# Altium PCB PCB1.PcbDoc (part 2 of 2)
Units mil, origin at the board's own origin, x right, y up, seen from the top; angles counter-clockwise.
Board outline 6000 x 4000 mil, 2 copper layers (Top Layer, Bottom Layer); 64 components, 67 nets, 213 pads, 0 vias.
Unrouted connection lines stored in the file: 121.
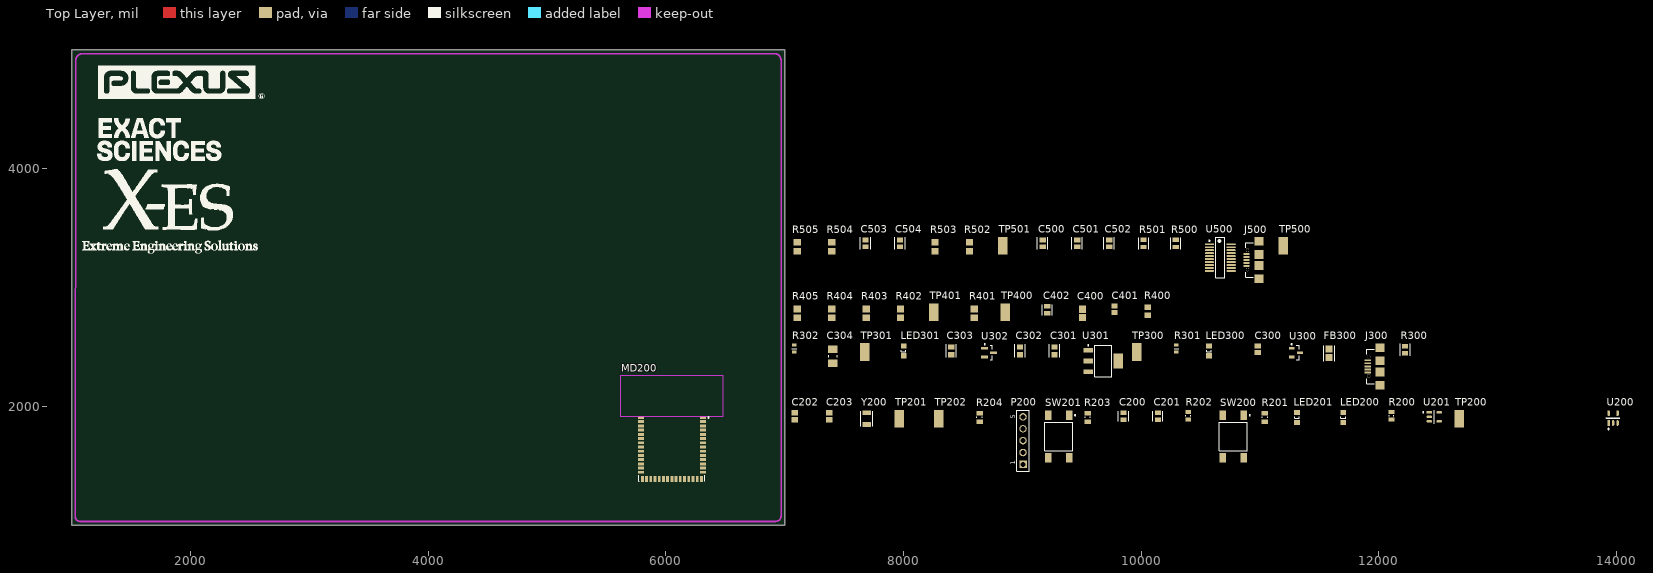
[diagram p0: Top Layer view]

## Nets (pads, with @x,y where several pads share a name; then routed paths per layer and width w, separated by ;. In a path a pad name is that pad's centre, name@x,y a point inside that pad or via, vN(x,y) a via of type N, cw(c..) or ccw(c..) an arc to the next point about the centre after c; other vN are vias at no path point) (continued)
P0_0: C202.2 MD200.5 Y200.1
P0_1: C203.2 MD200.6 Y200.2
P0_4: MD200.41
P0_5: MD200.2
P5_0: MD200.39
P5_1: MD200.40
P5_2: MD200.38
P5_3: MD200.37
P5_4: MD200.25
P6_2: MD200.28
P6_3: MD200.30
P6_4: MD200.24
P6_5: MD200.29
P7_1: MD200.23
P7_2: MD200.22 R405.1
P7_7: MD200.31
P9.0: MD200.17 R403.1
P9.1: MD200.18 R404.1
P9.2: MD200.21 R402.1
P9.3: MD200.9 R401.1
P9_4: MD200.14
P9_5: MD200.19
P9_6: MD200.20
P10.0: MD200.13 R502.1
P10.1: MD200.12 R503.1
P10.2: MD200.33 R504.1
P10.3: MD200.7 R505.1
P10.4: MD200.8
P10.5: MD200.11
P10.6: MD200.10
P12_6: MD200.34
P12_7: MD200.35
PB_IN: MD200.32 R203.1 SW201.2
PRG_RESET_N: P200.3 R204.1 U201.2
RESET1: U200.4 U201.1
RESET_N: R201.1 SW200.2 U200.2
SPI_CS: R401.2
SPI_SCLK: R402.2
SPI_SDI: R403.2
SPI_SDO: R404.2
SWDCLK: MD200.26 P200.4
SWDIO: MD200.27 P200.5
USB_D_M: C500.1 J500.2 R500.1
USB_D_P: C501.1 J500.3 R501.1
USBDM: R500.2 U500.12
USBDP: R501.2 U500.11
USR_LED: LED201.2 MD200.36
USR_LED_R: LED201.1 R202.2
VBACKUP: MD200.3
VREF: MD200.16
XRES_N: LED200.1 MD200.42 TP200.1 U201.4
XRES_N_R: LED200.2 R200.1
pads on no net: J300.2 J300.3 J300.MH1 J300.MH2 J300.Shell J500.1 J500.4 J500.MH1 J500.MH2 SW200.1 SW200.4 SW201.1 SW201.4 U500.1 U500.5 U500.7 U500.8 U500.10 U500.13 U500.17 U500.18 U500.19

## Keep-outs
Keep-Out Layer:
  lines w15: 1030,1070 ccw(c1072.5,1072.5) 1075,1030 ; 1030,1075 1035.21,4910.21 cw(c1090,4910.21) 1090,4965 ; 1080,1030 6920,1030 ; 1095,4965 6925,4965 ; 6915,4965 cw(c6916.5,4913.35) 6968.11,4916.05 ; 6925,1030 ccw(c6922.5,1077.5) 6970,1080 6970,4910

## Silkscreen, mask and mechanical layers (free items; w line width, h text height)
Top Overlay:
  drawing of 55 lines, arcs and shapes, not listed
Mechanical 1:
  lines w10: 6269.08,4970 1090.51,4967.99 ccw(c1091.62,4904.28) 1027.9,4904.28 1027.89,4904.44 1026.86,4888.14 1026.86,1079.07 ccw(c1080,1080) 1080,1026.85 6922.78,1026.86 ccw(c6921.85,1080) 6975,1080 6975,4605 6975,4920 ccw(c6921.86,4919.07) 6921.86,4972.22 6271.86,4972.22
Mechanical 2:
  lines w10: 6922.78,3616.86 ccw(c6921.85,3670) 6975,3670

## Text inside footprints (layer, text, board x,y; h text height)
J300: Mechanical 2 "PCB Edge" at 12092.68,2287.76 h16 r90
J500: Mechanical 2 "PCB Edge" at 11072.68,3182.76 h16 r90
P200: Top Overlay "5" at 8938.07,1895.04 h40 r90; Top Overlay "1" at 8938.07,1505.28 h40 r90